# EAGLE board 0123-chips-test-pcb-01 (EAGLE 9.6.2)

Size 82 x 50 mm. Coordinates in mm from the lower left corner, seen from the top.
Outline: 0,0 82,0 82,50 0,50 0,0
Copper layers (1*16): Top 0.0356mm / dielectric 1.5011mm / Bottom 0.0356mm
Design rules "OSH-CircuitMonkey": minimum track width 6mil, minimum drill 13mil, track to track 6mil, track to pad 6mil, pad to pad 6mil, via to via 6mil, smd to smd 6mil, copper to edge 15mil, drill to drill 6mil, minimum pad ring 7mil, minimum via ring 7mil, stop-mask expansion 3mil, vias tented up to drill 13mil, thermal gap 10mil

## Footprints (pad centres in the part's own frame; a part is rotated, then mirrored left to right if it is on the bottom)
MA05X1-VT-THD = drill 0.965 square: 1 0,0 | drill 0.965: 2 2.54,0; 3 5.08,0; 4 7.62,0; 5 10.16,0
MA04X1-VT-THD = drill 0.965 square: 1 -3.81,0 | drill 0.965: 2 -1.27,0; 3 1.27,0; 4 3.81,0
B2B-PH-SM4 = smd 1 x 6.2: 1 -1,-2.2; 2 1,-2.2 | smd 1.8 x 3: GND@MT1 3.55,0; GND@MT2 -3.55,0
MA02X1-VT-THD = drill 0.965 square: 1 -1.27,0 | drill 0.965: 2 1.27,0
MA09X1-VT-THD = drill 0.965 square: 1 -10.16,0 | drill 0.965: 2 -7.62,0; 3 -5.08,0; 4 -2.54,0; 5 0,0; 6 2.54,0; 7 5.08,0; 8 7.62,0; 9 10.16,0
MA03X2-VT-THD = drill 1 pad 1.705 square: 1 -2.54,-1.27 | drill 1 pad 1.705: 2 -2.54,1.27; 3 0,-1.27; 4 0,1.27; 5 2.54,-1.27; 6 2.54,1.27
MA03X1-VT-THD = drill 0.965 square: 1 0,0 | drill 0.965: 2 2.54,0; 3 5.08,0
MA08X1-VT-THD = drill 0.965 square: 1 -8.89,0 | drill 0.965: 2 -6.35,0; 3 -3.81,0; 4 -1.27,0; 5 1.27,0; 6 3.81,0; 7 6.35,0; 8 8.89,0
0116A = smd 1.4 x 1.8: !SD -4.6,2; IN+ -4.6,0; IN- -4.6,-2; SP+ 5.6,-1; SP- 5.6,1 | smd 1.8 x 1.4: GND 1,-3.6; VCC -1,3.6
TRIM_BOURNS_TC33X = smd 1 x 1.2: B -0.85,-1.8; T 0.85,-1.8 | smd 1.6 x 1.6: C 0,1.45
0117A = smd 1.4 x 1.8: GND -8.6,0; GND2 8.6,1.5; GND3 8.6,-3.5; IN1 -8.6,4; IN2 -8.6,2; IN3 -8.6,-2; IN4 -8.6,-4; OUT2 8.6,3.5; OUT3 8.6,-1.5 | smd 1.4 x 1.8 rotated 225: GND1 8,6; OUT1 6.5,7.5 | smd 1.4 x 1.8 rotated 135: GND4 6.5,-7.5; OUT4 8,-6
0118A = smd 1.4 x 1.8: 1 -3.6,3; 2 -3.6,1; 3 -3.6,-1; 4 -3.6,-3 | smd 1.8 x 1.4: GND 0,-4.6
0119A = smd 1.4 x 1.8: !RESET 9.6,-1; AREF 9.6,5; D0 -9.6,7; D1 -9.6,5; D2 -9.6,3; D3 -9.6,1; D4 -9.6,-1; D5 -9.6,-3; D6 -9.6,-5; D7 -9.6,-7; GND 9.6,-5; VCC 9.6,-3 | smd 1.8 x 1.4: A0 7,9.6; A1 5,9.6; A2 3,9.6; A3 1,9.6; A4 -1,9.6; A5 -3,9.6; A6 -5,9.6; A7 -7,9.6; D8 -7,-9.6; D9 -5,-9.6; D10 -3,-9.6; D11 -1,-9.6; D12 1,-9.6; D13 3,-9.6
0120A = smd 1.4 x 1.8: !LDAC -4.6,-1; A 4.6,-3; B 4.6,-1; C 4.6,1; D 4.6,3; RDY -4.6,-3; SCL -4.6,3; SDA -4.6,1 | smd 1.8 x 1.4: GND 1,-4.6; VCC -1,4.6
MA06X1-VT-THD = drill 0.965 square: 1 0,0 | drill 0.965: 2 2.54,0; 3 5.08,0; 4 7.62,0; 5 10.16,0; 6 12.7,0
0121A = smd 1.4 x 1.8: EN 4.6,2; GND -4.6,0; VIN -4.6,2; VOUT -4.6,-2
0122A = smd 1.4 x 1.8: BAT+ 4.6,1; BAT- 4.6,-1; GND -5.6,-1; VDD -5.6,1

## Placement (x,y rotation side)
J1  CON_05X1-MA-VT-THD  [MA05X1-VT-THD]  4,42.5 270 top
J4  CON_05X1-MA-VT-THD  [MA05X1-VT-THD]  4,26 270 top
J12  Header, 0.1in, THD, 04P  [MA04X1-VT-THD]  4,5.5 270 top
J13  2-pin, VT, SMT  [B2B-PH-SM4]  77.98,39.24 270 top
J14  [MA02X1-VT-THD]  71.05,38.74 270 top
J15  [MA02X1-VT-THD]  51.97,38.74 270 top
J16  Header, 9-pin  [MA09X1-VT-THD]  62.5,31 180 top
J17  Header, 9-pin  [MA09X1-VT-THD]  50,16.5 270 top
J18  [MA03X2-VT-THD]  78,4.5 270 top
J19  [MA02X1-VT-THD]  79.5,22 270 top
J20  3P, Male, Breakaway, 2.54mm  [MA03X1-VT-THD]  79.5,16.5 270 top
J21  Header, 8-pin  [MA08X1-VT-THD]  64,3.5 0 top
M1  class-d-amp  [0116A]  13,36.5 0 top
M1SPK  [MA02X1-VT-THD]  23,36.5 90 top
M1VOL  10K  [TRIM_BOURNS_TC33X]  10.5,44.5 90 top
M2  4-channel N-FET  [0117A]  36.86,34.2 90 top
M2IN  CON_05X1-MA-VT-THD  [MA05X1-VT-THD]  32,21 0 top
M3  Quad LED  [0118A]  12.5,21.5 0 top
M4  ATmega328P Module  [0119A]  63.54,17.55 0 top
M5  4-channel DAC  [0120A]  33.77,10.73 0 top
M5IN  [MA06X1-VT-THD]  24.5,14.5 270 top
M5OUT  CON_05X1-MA-VT-THD  [MA05X1-VT-THD]  42.5,14.5 270 top
M6  DCDC-5V@3A  [0121A]  13,5.26 0 top
M7  Li-Ion Charger  [0122A]  61.73,38.83 0 top
S1  [MA02X1-VT-THD]  27,48 0 top
S2  [MA02X1-VT-THD]  33.5,48 0 top
S3  [MA02X1-VT-THD]  40,48 0 top
S4  [MA02X1-VT-THD]  46.5,48 0 top

## Library data of the parts
J1 J4 J14 J15 J18-J20 M1SPK M2IN M5IN M5OUT S1-S4 = con-headers
J12 = con-headers; MFR: Molex; MPN: 022284043
J13 = con-jst; MFR: JST; MPN: B2B-PH-SM4
J16 J17 = con-headers; COST01: 0.15
J21 = con-headers; COST01: 0.14
M1 = circuit-monkey-chips; MFR: Circuit Monkey; MPN: 0116A
M1VOL = rlc; MFR: Bourns; MPN: TC33X
M2 = circuit-monkey-chips; MFR: Circuit Monkey; MPN: 0117A
M3 = circuit-monkey-chips; MFR: Circuit Monkey; MPN: 0118A
M4 = circuit-monkey-chips; MFR: Circuit Monkey; MPN: 0119A
M5 = circuit-monkey-chips; MFR: Circuit Monkey; MPN: 0120A
M6 = circuit-monkey-chips; MFR: Circuit Monkey; MPN: 0121A
M7 = circuit-monkey-chips; MFR: Circuit Monkey; MPN: 0122A

## Nets
!RESET: J18.5 J20.1 M4.!RESET
!SD: J1.1 M1.!SD
A: M5.A M5OUT.4
B: M5.B M5OUT.3
C: M5.C M5OUT.2
D: M5.D M5OUT.1
GND: J1.5 J4.5 J12.4 J15.2 J16.9 J17.9 J18.6 J19.2 J20.3 J21.8 M1.GND M2.GND M2IN.5 M3.GND M4.GND M5.GND M5IN.6 M5OUT.5 M6.GND M7.GND
IN1: M2.IN1 M2IN.1
IN2: M2.IN2 M2IN.2
IN3: M2.IN3 M2IN.3
IN4: M2.IN4 M2IN.4
IN+: J1.2 M1VOL.T
IN-: J1.3 M1.IN- M1VOL.B
LD1: J4.1 M3.1
LD2: J4.2 M3.2
LD3: J4.3 M3.3
LD4: J4.4 M3.4
M1VCC: J1.4 M1.VCC
M4_VCC: J18.2 J20.2 M4.VCC
M5VCC: M5.VCC M5IN.5
M6VOUT: J12.1 M6.VOUT
MISO: J18.1 J21.5 M4.D12
MOSI: J18.4 J21.4 M4.D11
N$1: M1.SP- M1SPK.2
N$2: M1.SP+ M1SPK.1
N$3: M5.RDY M5IN.4
N$4: M5.!LDAC M5IN.3
N$5: M5.SDA M5IN.2
N$6: M5.SCL M5IN.1
N$10: M2.GND1 S1.2
N$11: M2.OUT1 S1.1
N$12: M2.GND2 S2.2
N$13: M2.OUT2 S2.1
N$14: M2.GND3 S3.2
N$15: M2.OUT3 S3.1
N$16: M2.GND4 S4.2
N$17: M2.OUT4 S4.1
N$32: J12.2 M6.VIN
N$33: J12.3 M6.EN
N$34: J13.1 J14.1 M7.BAT+
N$35: J13.2 J14.2 M7.BAT-
N$36: J17.1 M4.D0
N$37: J15.1 M7.VDD
N$38: J17.2 M4.D1
N$39: J17.3 M4.D2
N$40: J17.4 M4.D3
N$41: J17.5 M4.D4
N$42: J17.6 M4.D5
N$43: J17.7 M4.D6
N$44: J17.8 M4.D7
N$45: J16.1 M4.A0
N$46: J16.2 M4.A1
N$47: J16.3 M4.A2
N$48: J16.4 M4.A3
N$49: J16.5 M4.A4
N$50: J16.6 M4.A5
N$51: J16.7 M4.A6
N$52: J16.8 M4.A7
N$53: J19.1 M4.AREF
N$54: M1.IN+ M1VOL.C
N$55: J21.1 M4.D8
N$56: J21.2 M4.D9
N$57: J21.3 M4.D10
SCK: J18.3 J21.6 M4.D13

## Tracks (layer width: path | path; a pad name or v marks a point on that pad's centre or on a via)
!RESET  (2 unrouted)
!SD  (1 unrouted)
A  (1 unrouted)
B  (1 unrouted)
C  (1 unrouted)
D  (1 unrouted)
GND  (19 unrouted)
IN1  (1 unrouted)
IN2  (1 unrouted)
IN3  (1 unrouted)
IN4  (1 unrouted)
IN+  (1 unrouted)
IN-  (2 unrouted)
LD1  (1 unrouted)
LD2  (1 unrouted)
LD3  (1 unrouted)
LD4  (1 unrouted)
M1VCC  (1 unrouted)
M4_VCC  (2 unrouted)
M5VCC  (1 unrouted)
M6VOUT  (1 unrouted)
MISO  (2 unrouted)
MOSI  (2 unrouted)
N$1  (1 unrouted)
N$2  (1 unrouted)
N$3  (1 unrouted)
N$4  (1 unrouted)
N$5  (1 unrouted)
N$6  (1 unrouted)
N$10  (1 unrouted)
N$11  (1 unrouted)
N$12  (1 unrouted)
N$13  (1 unrouted)
N$14  (1 unrouted)
N$15  (1 unrouted)
N$16  (1 unrouted)
N$17  (1 unrouted)
N$32  (1 unrouted)
N$33  (1 unrouted)
N$34  (2 unrouted)
N$35  (2 unrouted)
N$36  (1 unrouted)
N$37  (1 unrouted)
N$38  (1 unrouted)
N$39  (1 unrouted)
N$40  (1 unrouted)
N$41  (1 unrouted)
N$42  (1 unrouted)
N$43  (1 unrouted)
N$44  (1 unrouted)
N$45  (1 unrouted)
N$46  (1 unrouted)
N$47  (1 unrouted)
N$48  (1 unrouted)
N$49  (1 unrouted)
N$50  (1 unrouted)
N$51  (1 unrouted)
N$52  (1 unrouted)
N$53  (1 unrouted)
N$54  (1 unrouted)
N$55  (1 unrouted)
N$56  (1 unrouted)
N$57  (1 unrouted)
SCK  (2 unrouted)

## Text on the board
tPlace: !SD | IN+ | IN- | Vcc | GND | LD1 | D0 | LD2 | D1 | LD3 | D2 | D3 | LD4 | GND | D4 | SCL | D5 | SDA | D6 | Vout | !LDAC | D7 | Vin | RDY | GND | EN | Vcc | GND | GND | GND | D8 | D8 | D8 | D8 | D8 | D8 | D8 | GND